# Altium PCB PCM5102A-PCB.pcbdoc
Units mil, origin at the board's own origin, x right, y up, seen from the top; angles counter-clockwise.
Board outline not stored, 2 copper layers (Top Layer, Bottom Layer); 20 components, 0 nets, 61 pads, 0 vias.
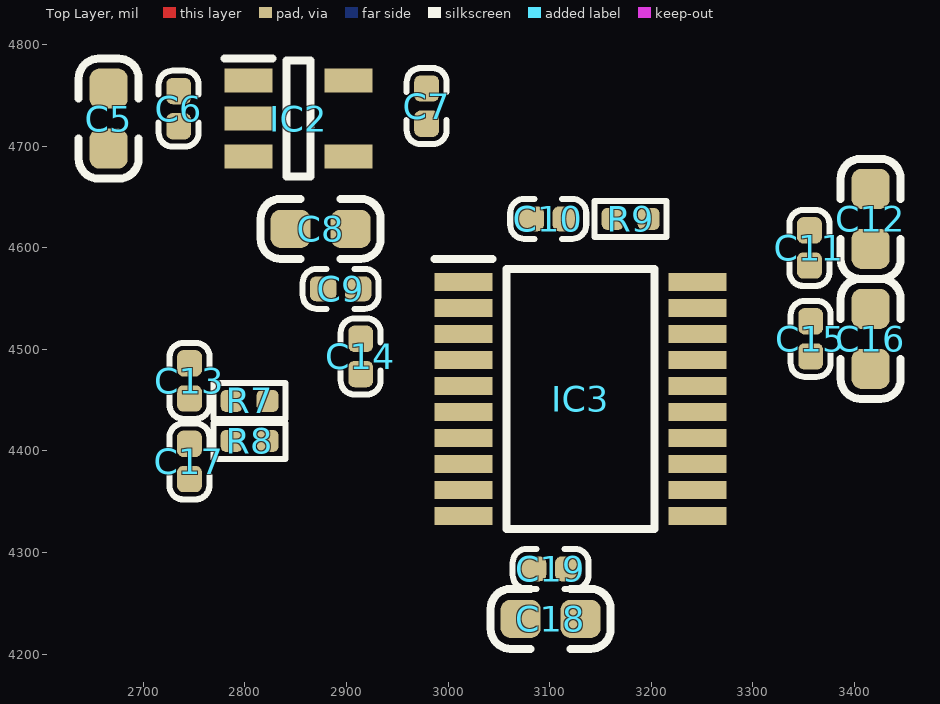
[diagram p0: Top Layer view]
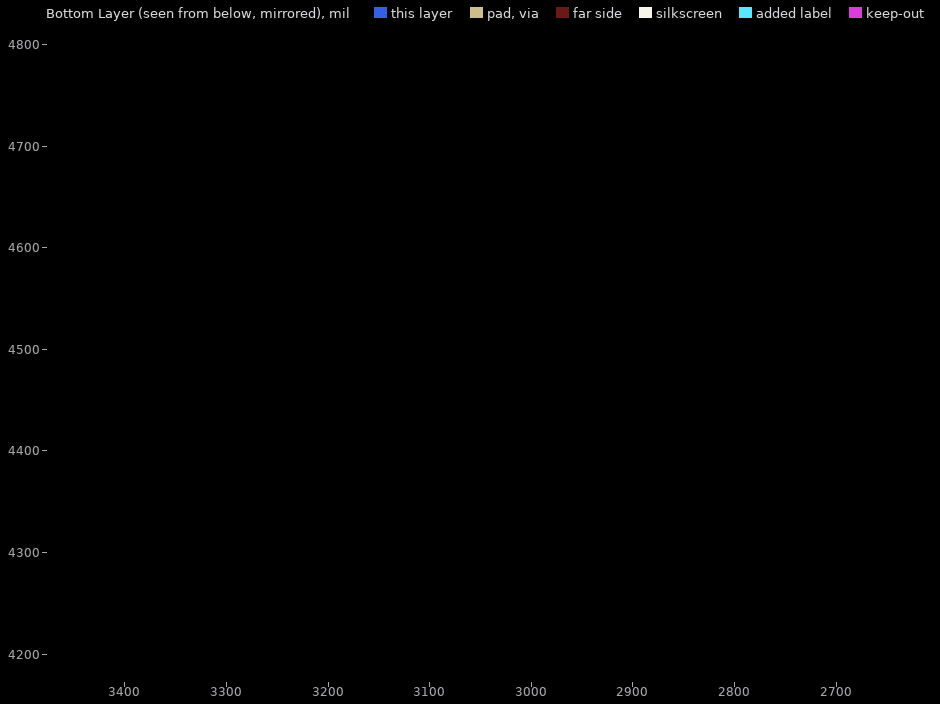
[diagram p1: Bottom Layer view, seen from below]

## Layer stack, top to bottom
Top Solder: solder mask 0.4, Solder Resist, Dk 3.5
Top Layer: signal copper 1.4
Dielectric 1: dielectric 12.6, FR-4, Dk 4.8
Bottom Layer: signal copper 1.4
Bottom Solder: solder mask 0.4, Solder Resist, Dk 3.5

## Components (designator, comment, footprint, x,y, rotation, side; value= is the part's Value field where it differs from the comment)
C5 "10uF" C_0603 2665.91,4727.1 r90 top
C6 "100nF" C_0402 2734.8,4736.94 r90 top
C7 "100nF" C_0402 2978.9,4739.45 r90 top
C8 "10uF" C_0603 2874.57,4618.62 r180 top
C9 "100nF" C_0402 2894.25,4559.57 r180 top
C10 "2.2F" C_0402 3098.58,4628.47 r0 top
C11 "100nF" C_0402 3355.63,4599.84 r90 top
C12 "10uF" C_0603 3415.91,4628.47 r90 top
C13 "22nF" C_0402 2745.55,4469.02 r90 top
C14 "2.2F" C_0402 2913.94,4493.03 r90 top
C15 "100nF" C_0402 3356.85,4510.36 r90 top
C16 "10uF" C_0603 3415.91,4510.36 r90 top
C17 "22nF" C_0402 2745.4,4389.72 r90 top
C18 "10uF" C_0603 3100.94,4234.77 r0 top
C19 "100nF" C_0402 3100.94,4283.98 r0 top
IC2 "TLV71333PDBVR" SOT95P280X145-5N 2852.91,4727.1 r0 top
IC3 "PCM5102APWR" SOP65P640X120-20N 3130.47,4451.3 r0 top
R7 "470Ω" R_0402 2804.61,4449.33 r180 top
R8 "470Ω" R_0402 2804.61,4409.96 r180 top
R9 "10kΩ" R_0402 3179.69,4628.47 r180 top

## Footprints (in the part's own frame and the unit in brackets; to place one, negate y for a bottom-side part, rotate by r counter-clockwise, add the part's x,y. Pads: shape width x height; smd on the part's side, far side on the other; paste and mask are expansions set on the pad)
C_0402 [mm] "Chip Capacitor, 2-Leads, Body 1.00x0.50mm, IPC Medium Density"
  rrect50% 0.66x0.62 smd: 1(-0.44,0) 2(0.44,0)
  silkscreen extent -0.95,-0.5 0.95,0.5, body extent -0.52,-0.27 0.53,0.28, height 0.55
C_0603 [mm] "Chip Capacitor, 2-Leads, Body 1.60x0.80mm, IPC Medium Density"
  rrect50% 1x0.95 smd: 1(-0.75,0) 2(0.75,0)
  silkscreen extent -1.5,-0.75 1.5,0.75, body extent -0.8,-0.4 0.8,0.4, height 0.87
R_0402 [mm] "Chip Resistor, 2-Leads, Body 1.00x0.50mm, IPC Medium Density"
  rrect50% 0.55x0.55 smd: 1(-0.45,0) 2(0.45,0)
  silkscreen extent -0.9,-0.45 0.9,0.45, body extent -0.5,-0.27 0.5,0.28, height 0.4
SOP65P640X120-20N [mm]
  rect 1.45x0.45 smd: 1(-2.925,2.925) 2(-2.925,2.275) 3(-2.925,1.625) 4(-2.925,0.975) 5(-2.925,0.325) 6(-2.925,-0.325) 7(-2.925,-0.975) 8(-2.925,-1.625) 9(-2.925,-2.275) 10(-2.925,-2.925) 11(2.925,-2.925) 12(2.925,-2.275) 13(2.925,-1.625) 14(2.925,-0.975) 15(2.925,-0.325) 16(2.925,0.325) 17(2.925,0.975) 18(2.925,1.625) 19(2.925,2.275) 20(2.925,2.925)
  silkscreen extent -3.65,-3.25 1.85,3.5, body extent -3.2,-3.25 3.2,3.25, height 1.2
SOT95P280X145-5N [mm]
  rect 1.2x0.6 smd: 1(-1.25,0.95) 2(-1.25,0) 3(-1.25,-0.95) 4(1.25,-0.95) 5(1.25,0.95)
  silkscreen extent -1.85,-1.45 0.3,1.5, body extent -1.4,-1.45 1.4,1.45, height 1.45

## Part data
C5 C6 C7 C8 C9 C10 C11 C12 C13 C14 C15 C16 C17 C18 C19: library part Cap_Chip, "贴片电容"
IC2: "Integrated Circuit", Manufacturer_Name="Texas Instruments", Mouser Part Number=595-TLV71333PDBVR, Arrow Part Number=TLV71333PDBVR, Arrow Price/Stock=https://www.arrow.com/en/products/tlv71333pdbvr/texas-instruments, Datasheet Link=http://www.ti.com/lit/gpn/tlv713p, Height=1.45mm, Manufacturer_Part_Number=TLV71333PDBVR, Mouser Price/Stock=https://www.mouser.co.uk/ProductDetail/Texas-Instruments/TLV71333PDBVR?qs=FBI%252BX3tnPf1lCQ%252BDbwaFmA%3D%3D
IC3: "Integrated Circuit", Manufacturer_Name="Texas Instruments", Mouser Part Number=595-PCM5102APWR, Arrow Part Number=PCM5102APWR, Arrow Price/Stock=https://www.arrow.com/en/products/pcm5102apwr/texas-instruments, Datasheet Link=https://componentsearchengine.com/Datasheets/2/PCM5102APWR.pdf, Height=1.2mm, Manufacturer_Part_Number=PCM5102APWR, Mouser Price/Stock=https://www.mouser.co.uk/ProductDetail/Texas-Instruments/PCM5102APWR?qs=E2%2FxqS9xjzrfECkwEYoiyg%3D%3D
R7 R8 R9: library part Res_Chip, "贴片电阻"

## Nets (pads, with @x,y where several pads share a name; then routed paths per layer and width w, separated by ;. In a path a pad name is that pad's centre, name@x,y a point inside that pad or via, vN(x,y) a via of type N, cw(c..) or ccw(c..) an arc to the next point about the centre after c; other vN are vias at no path point)
pads on no net: C5.1 C5.2 C6.1 C6.2 C7.1 C7.2 C8.1 C8.2 C9.1 C9.2 C10.1 C10.2 C11.1 C11.2 C12.1 C12.2 C13.1 C13.2 C14.1 C14.2 C15.1 C15.2 C16.1 C16.2 C17.1 C17.2 C18.1 C18.2 C19.1 C19.2 IC2.1 IC2.2 IC2.3 IC2.4 IC2.5 IC3.1 IC3.2 IC3.3 IC3.4 IC3.5 IC3.6 IC3.7 IC3.8 IC3.9 IC3.10 IC3.11 IC3.12 IC3.13 IC3.14 IC3.15 IC3.16 IC3.17 IC3.18 IC3.19 IC3.20 R7.1 R7.2 R8.1 R8.2 R9.1 R9.2